# Altium PCB PL2303EVM.PcbDoc
Units mm, origin at the board's own origin, x right, y up, seen from the top; angles counter-clockwise.
Board outline 12.06 x 31.75 mm, 2 copper layers (Top Layer, Bottom Layer); 10 components, 12 nets, 50 pads, 8 vias.
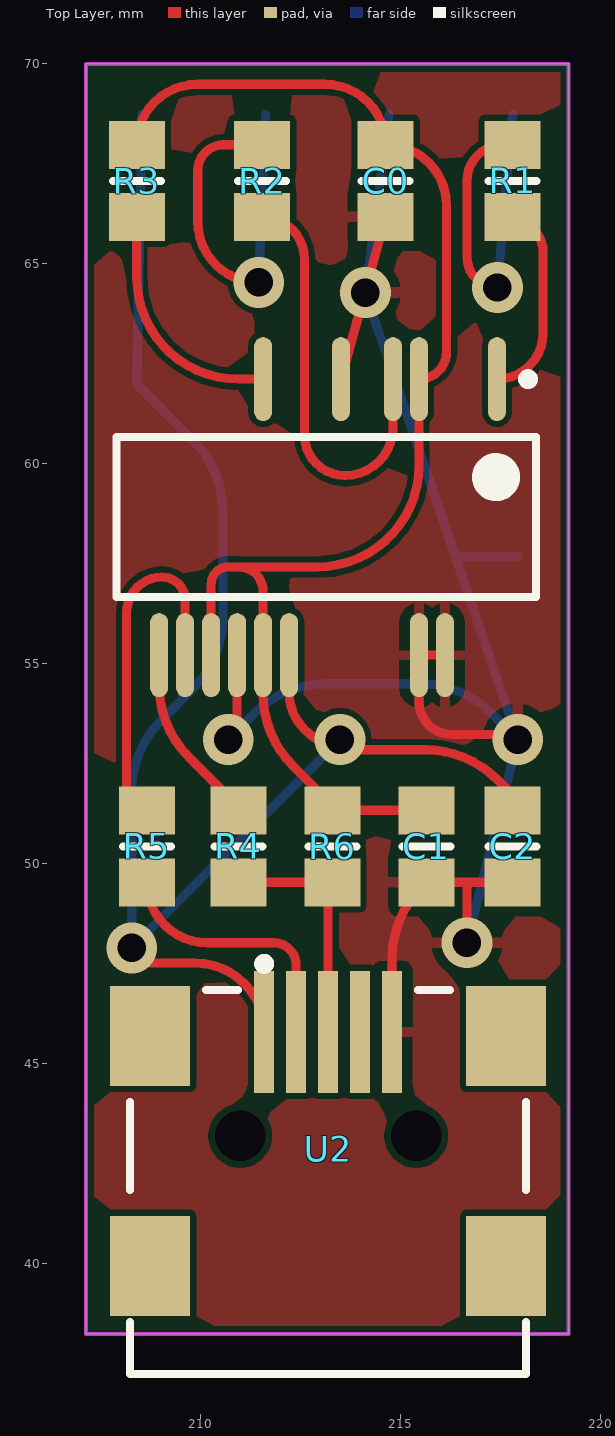
[diagram p0: Top Layer view]
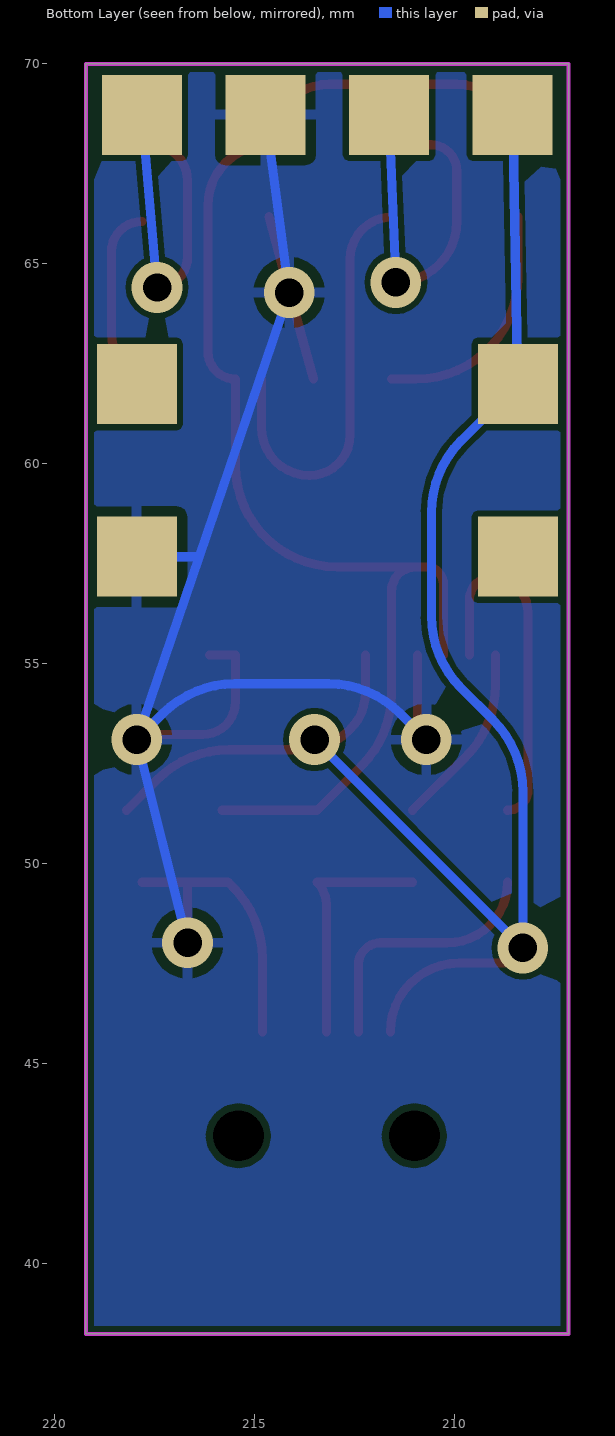
[diagram p1: Bottom Layer view, seen from below]

## Layer stack, top to bottom
Top Solder: solder mask 0.0102, Solder Resist, Dk 3.5
Top Layer: signal copper 0.0356
Dielectric 1: dielectric 0.32, FR-4, Dk 4.8
Bottom Layer: signal copper 0.0356
Bottom Solder: solder mask 0.0102, Solder Resist, Dk 3.5

## Board outline
207.137,38.227 207.137,69.977 219.202,69.977 219.202,38.227

## Design rules (kind name [scope] priority, off if disabled: settings)
Clearance [All] p1: gap=0.152 ignorepadtopadclearanceinfootprint=FALSE
HoleSize [All] p1: absolutevalues=TRUE maxlimit=2.54 minlimit=0.711 maxpercent=80.000 minpercent=20.000
HoleToHoleClearance [All] p1: gap=0.305 allowstackedmicrovias=TRUE
MinimumSolderMaskSliver [All] p1: minsoldermaskwidth=0
PolygonConnect [All] p1: connectstyle=Relief reliefconductorwidth=0.254 reliefentries=4 polygonreliefangle="90 Angle" airgapwidth=0.254
RoutingVias [All] p1: holewidth=0.711 width=1.27 viastyle="Through Hole" minholewidth=0.711 minwidth=1.27 maxholewidth=0.711 maxwidth=1.27
SilkToSilkClearance [All] p1: silktosilkclearance=0
SilkToSolderMaskClearance [IsPad] p1: minsilkscreentomaskgap=0 clearancetoexposedcopper=TRUE
SolderMaskExpansion [All] p1: expansion=0.102
Width [All] p1: maxlimit=25.4 minlimit=0.152 preferedwidth=0.229
25 further rules are at their usual default settings.

## Components (designator, comment, footprint, x,y, rotation, side; value= is the part's Value field where it differs from the comment)
C0 "104" 0805 214.63,67.056 r270 top
C1 "104" 0805 215.646,50.419 r270 top
C2 "104" 0805 217.805,50.419 r270 top
R1 "100" 0805 217.805,67.056 r90 top
R2 "100" 0805 211.54,67.056 r90 top
R3 "4.7k" 0805 208.407,67.056 r90 top
R4 "27" 0805 210.947,50.419 r90 top
R5 "27" 0805 208.661,50.419 r90 top
R6 "1.5k" 0805 213.296,50.419 r90 top
U2 "MicroUSB" USB/SM0.8-6H5 213.192,37.93 r270 top

## Footprints (in the part's own frame and the unit in brackets; to place one, negate y for a bottom-side part, rotate by r counter-clockwise, add the part's x,y. Pads: shape width x height; smd on the part's side, far side on the other; paste and mask are expansions set on the pad)
0805 [mm] "Chip Resistor, Body 2.0x1.2mm, IPC Medium Density"
  rect 1.2x1.4 smd: 1(-0.9,0) 2(0.9,0)
  silkscreen extent 0,-0.6 0,0.6, body extent -1.07,-0.7 1.07,0.7, height 0.7
USB/SM0.8-6H5 [mm]
  rect 3.048x0.5 smd: 1(-7.85,-1.6) 2(-7.85,-0.8) 3(-7.85,0) 4(-7.85,0.8) 5(-7.85,1.6)
  round 0.6 hole 1.27 unplated: MH1(-5.25,2.2) MH2(-5.25,-2.2)
  rect 2.5x2 smd: ""(-7.75,4.45) ""(-7.75,-4.45) ""(-1.996,4.45) ""(-1.996,-4.45)
  silkscreen extent -9.67,-4.95 0.7,4.95

## Part data
C0 C1 C2: library part C, "Capacitor", LatestRevisionDate=17-Jul-2002, LatestRevisionNote="Re-released for DXP Platform.", PackageDescription="Radial Cap, Thru-Hole; 2 Leads; 0.3 in Pin Spacing", PackageReference=RAD-0.3, Published=8-Jun-2000, Publisher="Altium Limited"
R1 R2 R3 R4 R5 R6: library part R, "Resistor", LatestRevisionDate=17-Jul-2002, LatestRevisionNote="Re-released for DXP Platform.", PackageDescription="Axial Device, Thru-Hole; 2 Leads; 0.4 in Pin Spacing", PackageReference=AXIAL-0.4, Published=8-Jun-2000, Publisher="Altium Limited"

## Free pads (board coordinates)
  oval 0.45x2.1 smd: 1(217.413,62.099) 4(215.463,62.099) 5(214.813,62.099) 7(213.513,62.099) 10(211.566,62.099) 15(208.966,55.199) 16(209.616,55.199) 17(210.266,55.199) 18(210.916,55.199) 19(211.566,55.199) 20(212.216,55.199) 25(215.463,55.199) 26(216.113,55.199)
  rect 2x2 smd far side: 2(208.534,68.707) 3(211.624,68.707) 4(214.715,68.707) 5(217.805,68.707) 29(208.407,61.976) 30(217.932,61.976) 31(208.407,57.658) 33(217.932,57.658)

## Via types
v1: diameter 1.27, hole 0.711, Top Layer to Bottom Layer, 8 vias

## Nets (pads, with @x,y where several pads share a name; then routed paths per layer and width w, separated by ;. In a path a pad name is that pad's centre, name@x,y a point inside that pad or via, vN(x,y) a via of type N, cw(c..) or ccw(c..) an arc to the next point about the centre after c; other vN are vias at no path point)
GND: C0.2 C1.2 C2.2 pad.4@214.715,68.707 pad.7 pad.18 pad.25 pad.26 pad.33 U2.5 | length 50.2
  Top Layer w0.229: v1(210.693,53.086) ccw(c210.693,53.309) 210.916,53.309 pad.18 ; pad.7 214.11,64.265 C0.2 ; U2.5 214.792,47.613 cw(c217.332,47.613) 215.536,49.409 C1.2 216.726,49.519 ; pad.26 pad.25 215.463,54.031 ccw(c216.281,54.031) 216.281,53.213 217.805,53.213 cw(c217.805,53.086) v1(217.932,53.086) ; v1(216.662,48.006) 216.662,49.455 cw(c216.726,49.455) 216.726,49.519 ; C2.2 216.726,49.519
  Bottom Layer w0.229: v1(210.693,53.086) 211.346,53.739 cw(c213.142,51.943) 213.142,54.483 215.483,54.483 cw(c215.483,51.943) 217.279,53.739 v1(217.932,53.086) ; pad.4@214.715,68.707 v1(214.122,64.262) 216.373,57.658 ; v1(216.662,48.006) v1(217.932,53.086) ; pad.33 216.373,57.658 ; 216.373,57.658 v1(217.932,53.086)
NetR1_1: pad.1 R1.1 | length 5
  Top Layer w0.229: pad.1 ccw(c217.413,63.253) 218.567,63.253 218.567,65.278 ccw(c217.805,65.278) R1.1@217.805,66.04
NetR2_1: pad.5@214.813,62.099 R2.1 | length 10.7
  Top Layer w0.229: R2.1 cw(c211.54,65.098) 212.598,65.098 212.598,60.706 ccw(c213.614,60.706) 213.614,59.69 ccw(c213.614,60.889) 214.813,60.889 pad.5@214.813,62.099
NetR3_1: pad.10 R3.1 | length 6.1
  Top Layer w0.229: R3.1 208.407,64.639 ccw(c210.947,64.639) 210.947,62.099 pad.10
NetR4_1: R4.1 R6.1 U2.3 | length 6.2
  Top Layer w0.229: R4.1@211.042,49.519 R6.1 213.423,49.519 ccw(c213.982,48.96) 213.192,48.96 U2.3
NetR4_2: pad.15 R4.2 | length 4.6
  Top Layer w0.229: pad.15 208.966,54.447 ccw(c211.506,54.447) 209.5,52.889 ccw(c211.506,54.447) 209.71,52.651 R4.2@211.042,51.319
NetR5_1: R5.1 U2.2 | length 6.6
  Top Layer w0.229: R5.1 ccw(c210.174,49.519) 210.174,48.006 211.836,48.006 cw(c211.836,47.45) 212.392,47.45 U2.2
NetR5_2: pad.16 R5.2 | length 8.9
  Top Layer w0.229: R5.2 cw(c208.661,51.827) 208.153,51.827 208.153,56.261 cw(c209.042,56.261) 209.042,57.15 cw(c209.042,56.576) 209.616,56.576 pad.16
Uart3_Rx: pad.5@217.805,68.707 R1.2 | length 9.1
  Top Layer w0.229: v1(217.424,64.389) cw(c217.424,65.151) 216.662,65.151 216.662,67.056 cw(c217.562,67.056) 217.562,67.956 R1.2
  Bottom Layer w0.229: v1(217.424,64.389) pad.5@217.805,68.707
Uart3_Tx: pad.3 R2.2 | length 9.8
  Top Layer w0.229: v1(211.455,64.516) cw(c211.455,66.04) 209.931,66.04 209.931,67.31 cw(c210.577,67.31) 210.577,67.956 R2.2
  Bottom Layer w0.229: v1(211.455,64.516) pad.3
VO33: C0.1 C1.1 pad.4@215.463,62.099 pad.17 pad.19 R3.2 R6.2 | length 35.4
  Top Layer w0.229: R3.2 cw(c209.92,67.956) 209.92,69.469 213.117,69.469 cw(c213.117,67.956) C0.1 cw(c214.63,66.432) 216.154,66.432 216.154,62.79 cw(c215.463,62.79) 215.463,62.099 215.463,59.944 cw(c212.923,59.944) 212.923,57.404 210.947,57.404 ; pad.17 210.266,56.977 cw(c210.693,56.977) 210.693,57.404 210.947,57.404 ; C1.1@215.805,51.319 213.423,51.319 212.31,52.432 cw(c214.106,54.228) 211.566,54.228 pad.19 211.566,56.785 ccw(c210.947,56.785) 210.947,57.404
Vusb: C2.1 pad.2 pad.20 pad.29 U2.1 | length 42.4
  Top Layer w0.229: v1(208.28,47.879) ccw(c208.661,47.879) 208.661,47.498 209.874,47.498 cw(c209.874,45.78) U2.1 ; pad.20 212.216,54.261 ccw(c213.519,54.261) 212.598,53.34 ccw(c213.824,54.566) 213.824,52.832 215.621,52.832 cw(c215.621,50.292) 217.417,52.088 C2.1@218.186,51.319
  Bottom Layer w0.229: pad.2 pad.29 209.822,60.561 cw(c208.026,58.765) 210.566,58.765 210.566,56.17 cw(c208.026,56.17) 209.822,54.374 209.024,53.576 ccw(c210.82,51.78) 208.28,51.78 v1(208.28,47.879) v1(213.487,53.086)
pads on no net: U2. U2.4 U2.MH1 U2.MH2

## Polygon pours and split planes (outlines as drawn)
GND on Top Layer "GND_L01_P000" (solid, pour order 0): 207.137,69.977 219.202,69.977 219.202,38.227 207.137,38.227
GND on Bottom Layer "GND_L02_P002" (solid, pour order 2): 207.137,69.977 219.202,69.977 219.202,38.227 207.137,38.227

## Keep-outs
Keep-Out Layer:
  the board outline again, w0.102

## Silkscreen, mask and mechanical layers (free items; w line width, h text height)
Top Overlay:
  circle w0.6: c217.388,59.649 r0.3
  circle w0.25: c218.188,62.099 r0.125
  lines w0.2: 207.899,56.649 207.899,60.649 218.388,60.649 218.388,56.649 207.899,56.649
Mechanical 13:
  circle w0.1: c217.488,60.449 r0.5
  lines w0.1: 207.848,55.949 207.848,61.349 218.388,61.349 218.388,55.949 207.848,55.949
Mechanical 15:
  lines w0.1: 214.638,58.649 215.638,58.649 ; 215.138,58.149 215.138,59.149 ; 207.696,53.899 207.696,63.399 218.638,63.399 218.638,53.899 207.696,53.899